# Altium PCB Sallen.PcbDoc
Units mm, origin at the board's own origin, x right, y up, seen from the top; angles counter-clockwise.
Board outline 100.27 x 50.25 mm, 2 copper layers (Top Layer, Bottom Layer); 102 components, 15 nets, 204 pads, 21 vias.
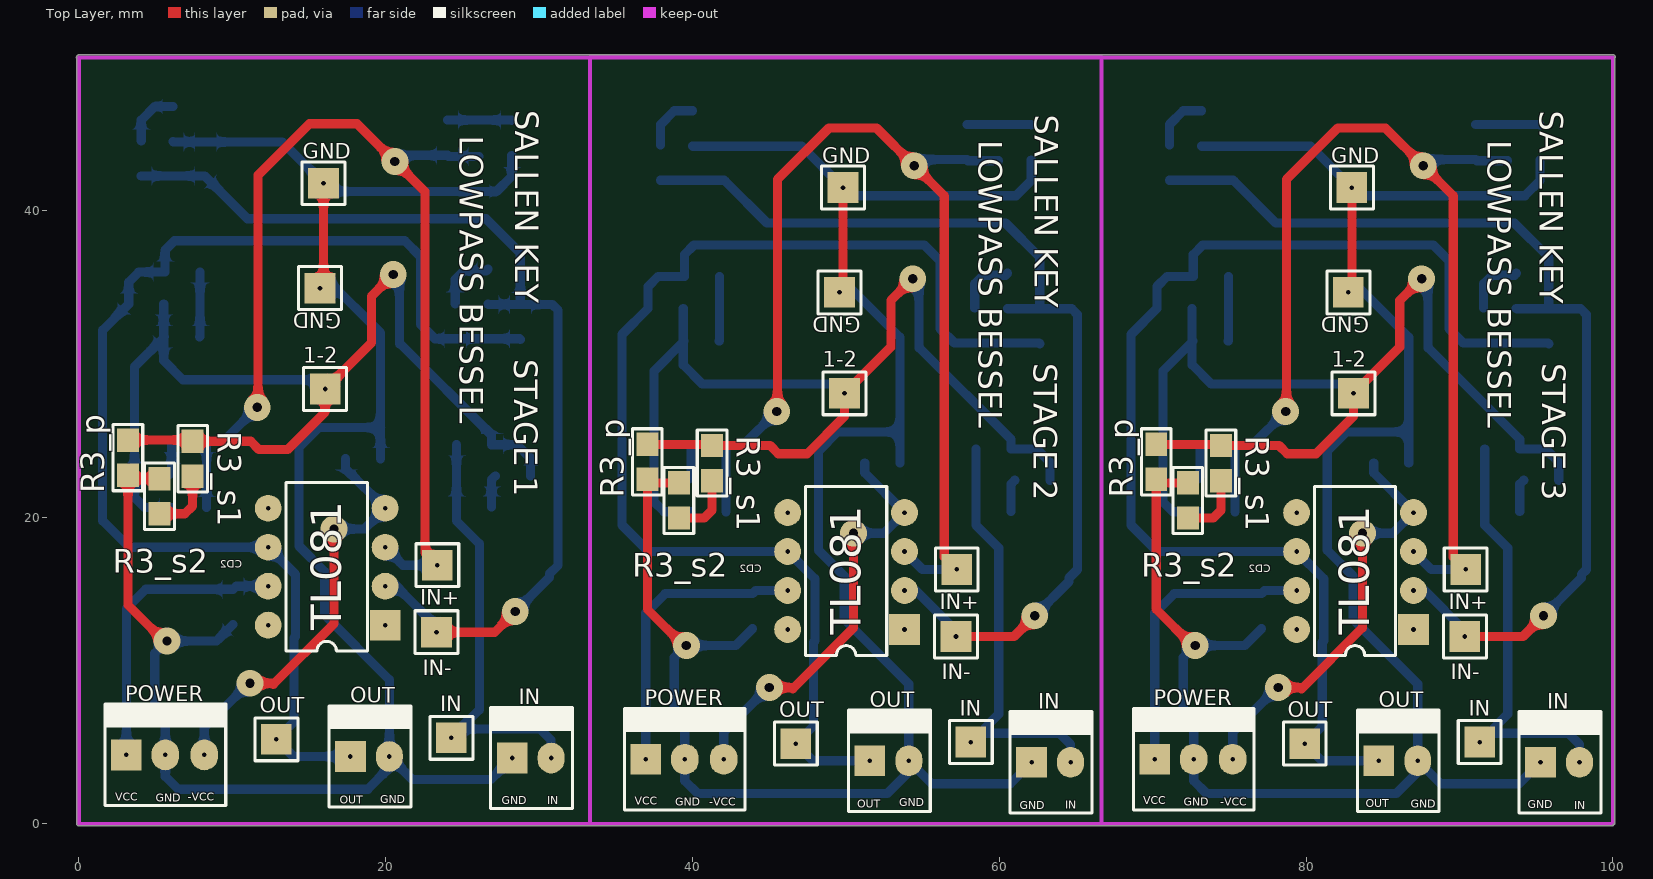
[diagram p0: Top Layer view]
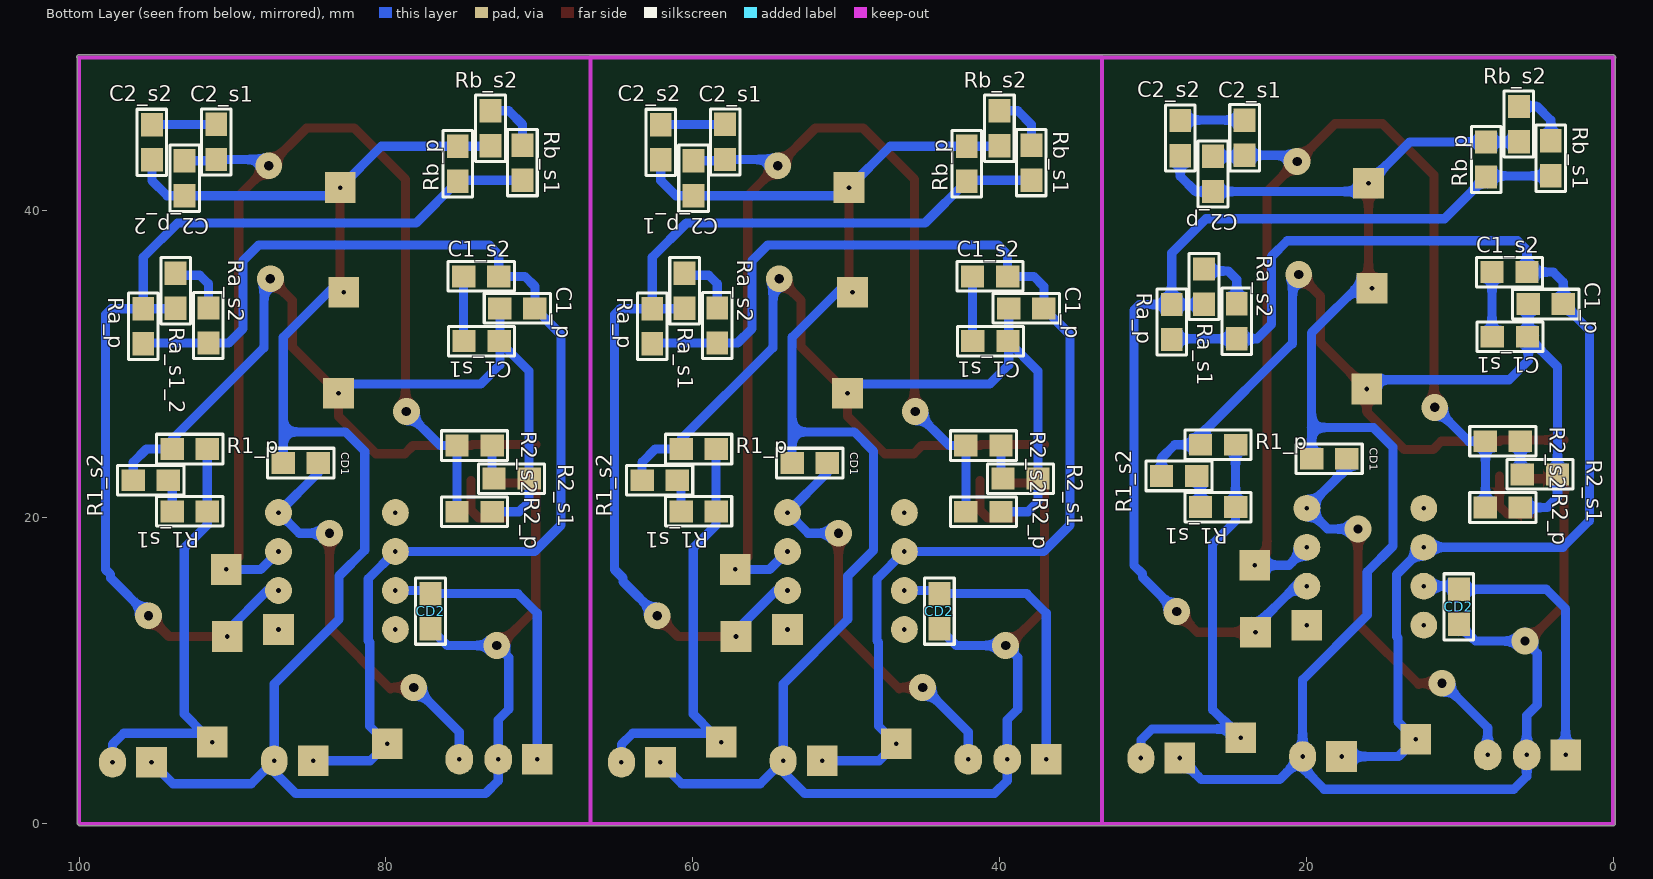
[diagram p1: Bottom Layer view, seen from below]
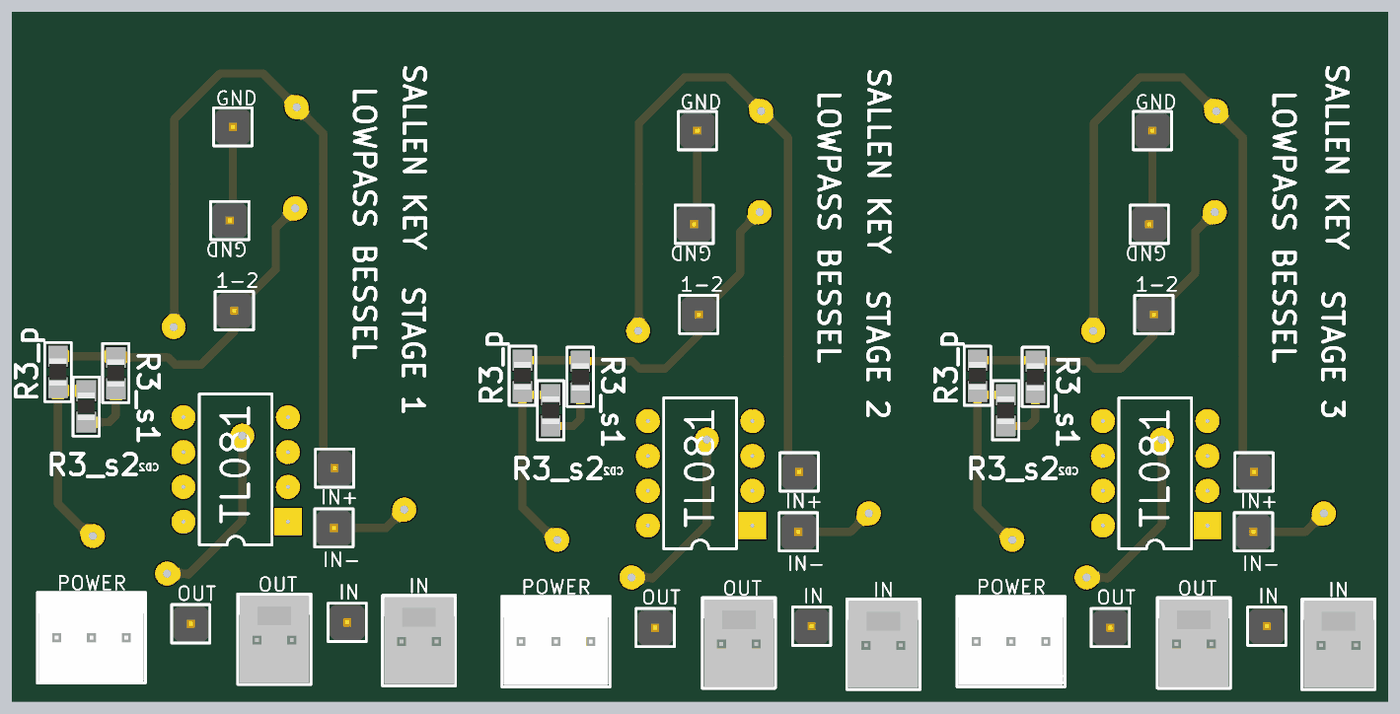
[diagram p2: 3D render of the assembled board from above, using the file's embedded part models]
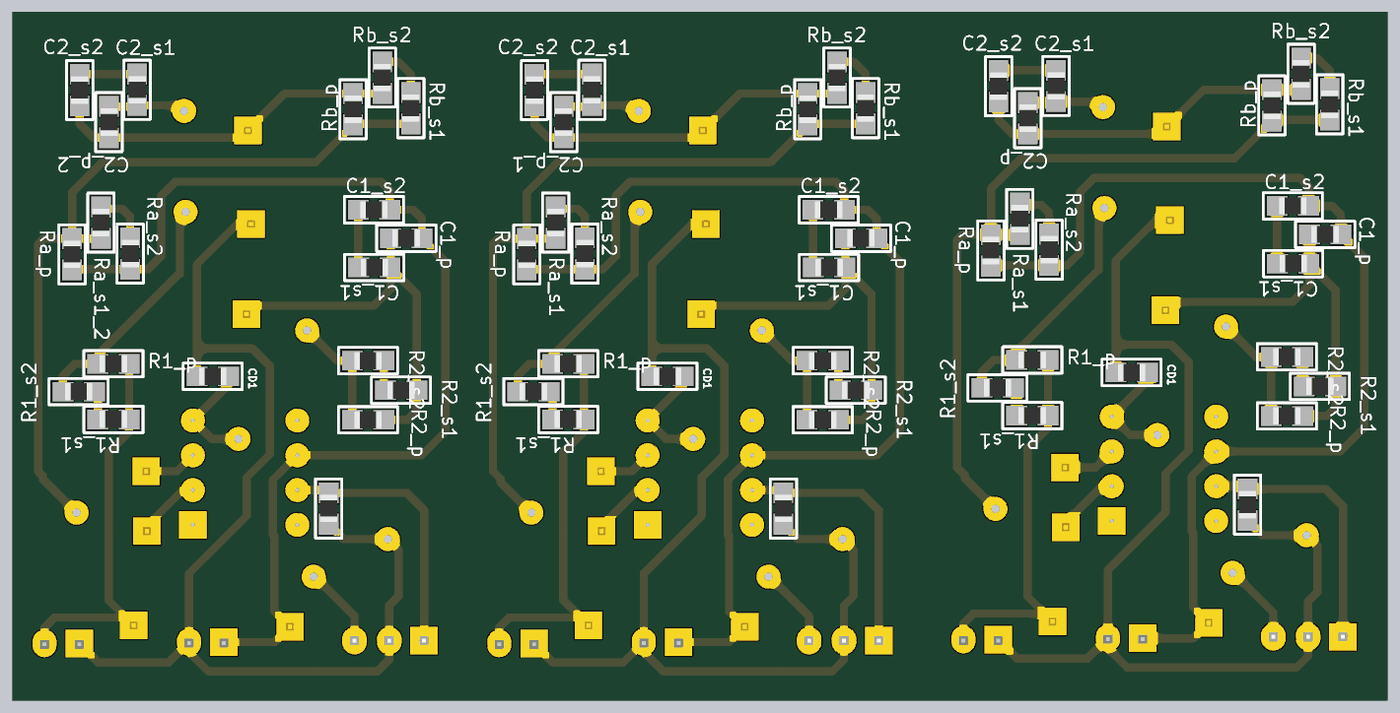
[diagram p3: 3D render of the assembled board from below, using the file's embedded part models]

## Layer stack, top to bottom
Top Solder: solder mask 0.0102, Solder Resist, Dk 3.5
Top Layer: signal copper 0.0356
Dielectric 1: dielectric 0.32, FR-4, Dk 4.8
Bottom Layer: signal copper 0.0356
Bottom Solder: solder mask 0.0102, Solder Resist, Dk 3.5

## Board outline
-0.127,0 -0.127,49.911 cw(c0,49.911) -0.119,49.956 -0.119,49.955 cw(c0,50) 0,50.127 100.012,50.127 cw(c100.012,50) 100.14,50 cw(c100.012,50) 100.127,49.945 100.127,0.076 cw(c100,0.076) 100.044,-0.044 cw(c99.924,0) 99.924,-0.127 0,-0.127 cw(c0,0)

## Design rules (kind name [scope] priority, off if disabled: settings)
Clearance [All] p1: gap=0.6 ignorepadtopadclearanceinfootprint=FALSE
PolygonConnect [All] p1: connectstyle=Relief reliefconductorwidth=0.254 reliefentries=4 polygonreliefangle="90 Angle" airgapwidth=0.254
RoutingVias [All] p1: holewidth=0.7 width=2.5 viastyle="Through Hole" minholewidth=0.7 minwidth=2.5 maxholewidth=0.7 maxwidth=2.5
SolderMaskExpansion [All] p1: expansion=0.102
Width [All] p1: maxlimit=0.6 minlimit=0.6 preferedwidth=0.6
30 further rules are at their usual default settings.

## Classes and differential pairs
component class Sallen: CD1 CD2 POWER1 R3_p R3_s1 R3_s2

## Components (designator, comment, footprint, x,y, rotation, side; value= is the part's Value field where it differs from the comment)
1-2 "1-2" TPTH 83.083,28.067 r0 top (schematic designator TP9)
1-2 "1-2" TPTH 49.911,28.067 r0 top (schematic designator TP9)
1-2 "1-2" TPTH 16.053,28.346 r0 top (schematic designator TP9)
C1_p "CAP" 0805 71.425,33.604 r180 bottom
C1_p "CAP" 0805 38.252,33.604 r180 bottom
C1_p "CAP" 0805 4.394,33.884 r180 bottom
C1_s1 "CAP" 0805 73.762,31.471 r0 bottom
C1_s1 "CAP" 0805 40.589,31.471 r0 bottom
C1_s1 "CAP" 0805 6.731,31.75 r0 bottom
C1_s2 "CAP" 0805 73.787,35.687 r180 bottom
C1_s2 "CAP" 0805 40.615,35.687 r180 bottom
C1_s2 "CAP" 0805 6.756,35.966 r180 bottom
C2_p "CAP" 0805 26.086,42.367 r270 bottom
C2_p_1 "CAP" 0805 59.944,42.088 r270 bottom (schematic designator C2_p)
C2_p_2 "CAP" 0805 93.116,42.088 r270 bottom (schematic designator C2_p)
C2_s1 "CAP" 0805 91.059,44.45 r90 bottom
C2_s1 "CAP" 0805 57.887,44.45 r90 bottom
C2_s1 "CAP" 0805 24.028,44.729 r90 bottom
C2_s2 "CAP" 0805 95.25,44.425 r270 bottom
C2_s2 "CAP" 0805 62.078,44.425 r270 bottom
C2_s2 "CAP" 0805 28.219,44.704 r270 bottom
CD1 "CAP" 0805 85.547,23.52 r0 bottom
CD1 "CAP" 0805 52.375,23.52 r0 bottom
CD1 "CAP" 0805 18.517,23.8 r0 bottom
CD2 "CAP" 0805 77.089,13.868 r270 bottom
CD2 "CAP" 0805 43.917,13.868 r270 bottom
CD2 "CAP" 0805 10.058,14.148 r270 bottom
GND "TP" TPTH 82.753,34.646 r90 top (schematic designator TP3)
GND "TP" TPTH 82.982,41.478 r90 top (schematic designator TP2)
GND "TP" TPTH 49.581,34.646 r90 top (schematic designator TP3)
GND "TP" TPTH 49.809,41.478 r90 top (schematic designator TP2)
GND "TP" TPTH 15.951,41.758 r90 top (schematic designator TP2)
GND "TP" TPTH 15.723,34.925 r90 top (schematic designator TP3)
IN "IN" TPTH 91.313,5.334 r0 top (schematic designator TP4)
IN "IN" MOLEX2 95.275,4.013 r0 top (schematic designator J3)
IN "IN" TPTH 58.141,5.334 r0 top (schematic designator TP4)
IN "IN" MOLEX2 62.103,4.013 r0 top (schematic designator J3)
IN "IN" MOLEX2 28.245,4.293 r0 top (schematic designator J3)
IN "IN" TPTH 24.282,5.613 r0 top (schematic designator TP4)
IN+ "IN+" TPTH 90.399,16.586 r0 top (schematic designator TP7)
IN+ "IN+" TPTH 57.226,16.586 r0 top (schematic designator TP7)
IN+ "IN+" TPTH 23.368,16.866 r0 top (schematic designator TP7)
IN- "IN-" TPTH 90.348,12.217 r0 top (schematic designator TP6)
IN- "IN-" TPTH 57.175,12.217 r0 top (schematic designator TP6)
IN- "IN-" TPTH 23.317,12.497 r0 top (schematic designator TP6)
OUT "OUT" TPTH 79.908,5.232 r0 top (schematic designator TP5)
OUT "OUT" MOLEX2 84.734,4.115 r0 top (schematic designator J4)
OUT "OUT" TPTH 46.736,5.232 r0 top (schematic designator TP5)
OUT "OUT" MOLEX2 51.562,4.115 r0 top (schematic designator J4)
OUT "OUT" MOLEX2 17.704,4.394 r0 top (schematic designator J4)
OUT "OUT" TPTH 12.878,5.512 r0 top (schematic designator TP5)
POWER "SUPPLY" MOLEX3 70.129,4.216 r0 top (schematic designator J2)
POWER "SUPPLY" MOLEX3 36.957,4.216 r0 top (schematic designator J2)
POWER "SUPPLY" MOLEX3 3.099,4.496 r0 top (schematic designator J2)
R1_p "270" 0805 92.786,24.435 r180 bottom
R1_p "270" 0805 59.614,24.435 r180 bottom
R1_p "270" 0805 25.756,24.714 r180 bottom
R1_s1 "270" 0805 92.786,20.371 r180 bottom
R1_s1 "270" 0805 59.614,20.371 r180 bottom
R1_s1 "270" 0805 25.756,20.65 r180 bottom
R1_s2 "270" 0805 95.326,22.403 r0 bottom
R1_s2 "270" 0805 62.154,22.403 r0 bottom
R1_s2 "270" 0805 28.296,22.682 r0 bottom
R2_p "270" 0805 74.219,20.345 r180 bottom
R2_p "270" 0805 41.046,20.345 r180 bottom
R2_p "270" 0805 7.188,20.625 r180 bottom
R2_s1 "270" 0805 71.806,22.504 r180 bottom
R2_s1 "270" 0805 38.633,22.504 r180 bottom
R2_s1 "270" 0805 4.775,22.784 r180 bottom
R2_s2 "270" 0805 74.219,24.663 r0 bottom
R2_s2 "270" 0805 41.046,24.663 r0 bottom
R2_s2 "270" 0805 7.188,24.943 r0 bottom
R3_p "270" 0805 70.231,23.597 r90 top
R3_p "270" 0805 37.059,23.597 r90 top
R3_p "270" 0805 3.2,23.876 r90 top
R3_s1 "270" 0805 74.447,23.52 r90 top
R3_s1 "270" 0805 41.275,23.52 r90 top
R3_s1 "270" 0805 7.417,23.8 r90 top
R3_s2 "270" 0805 72.288,21.082 r270 top
R3_s2 "270" 0805 39.116,21.082 r270 top
R3_s2 "270" 0805 5.258,21.361 r270 top
Ra_p "270" 0805 95.809,32.436 r90 bottom
Ra_p "270" 0805 62.636,32.436 r90 bottom
Ra_p "270" 0805 28.778,32.715 r90 bottom
Ra_s1 "270" 0805 60.528,34.747 r270 bottom
Ra_s1 "270" 0805 26.67,35.027 r270 bottom
Ra_s1_2 "270" 0805 93.701,34.747 r270 bottom (schematic designator Ra_s1)
Ra_s2 "270" 0805 91.567,32.487 r270 bottom
Ra_s2 "270" 0805 58.395,32.487 r270 bottom
Ra_s2 "270" 0805 24.536,32.766 r270 bottom
Rb_p "270" 0805 75.311,43.028 r270 bottom
Rb_p "270" 0805 42.139,43.028 r270 bottom
Rb_p "270" 0805 8.28,43.307 r270 bottom
Rb_s1 "270" 0805 71.095,43.104 r270 bottom
Rb_s1 "270" 0805 37.922,43.104 r270 bottom
Rb_s1 "270" 0805 4.064,43.383 r270 bottom
Rb_s2 "270" 0805 73.177,45.339 r90 bottom
Rb_s2 "270" 0805 40.005,45.339 r90 bottom
Rb_s2 "270" 0805 6.147,45.618 r90 bottom
TL081 "TL081" P008 83.185,16.485 r90 top (schematic designator U1)
TL081 "TL081" P008 50.013,16.485 r90 top (schematic designator U1)
TL081 "TL081" P008 16.154,16.764 r90 top (schematic designator U1)

## Footprints (in the part's own frame and the unit in brackets; to place one, negate y for a bottom-side part, rotate by r counter-clockwise, add the part's x,y. Pads: shape width x height; smd on the part's side, far side on the other; paste and mask are expansions set on the pad)
0805 [mil] "Pasivo 0805"
  rect 60x56 smd: 1(-45,0) 2(45,0)
  silkscreen extent -85,-38 85,38, body extent -40,-24 39,25, height 15
MOLEX2 [mm]
  rect 2x2 hole 0.3: 1(0,0)
  oval 1.75x2 hole 0.3: 2(2.54,0)
  silkscreen extent -1.4,-3.3 3.94,3.3, body extent -1.27,-3.17 3.81,3.17, height 10.74
MOLEX3 [mm]
  rect 2x2 hole 0.3: 1(0,0)
  oval 1.8x2 hole 0.3: 2(2.54,0) 3(5.08,0)
  silkscreen extent -1.4,-3.3 6.48,3.3, body extent -1.27,-3.17 6.35,3.17, height 10.74
P008 [mm] "DIP; 8 Leads; Row Spacing 7.62 mm; Pitch 2.54 mm"
  rect 2x2 hole 0.3: 1(-3.81,-3.81)
  round 1.75 hole 0.3: 2(-1.27,-3.81) 3(1.27,-3.81) 4(3.81,-3.81) 5(3.81,3.81) 6(1.27,3.81) 7(-1.27,3.81) 8(-3.81,3.81)
  silkscreen extent -5.5,-2.65 5.5,2.65
TPTH [mm]
  rect 2x2 hole 0.3: 1(0,0)
  silkscreen extent -1.4,-1.4 1.4,1.4, body extent -1.27,-1.27 1.27,1.27, height 6.04

## Part data
1-2 1-2 1-2 IN IN IN IN+ IN+ IN+ IN- IN- IN- OUT OUT OUT: library part TP
IN IN IN OUT OUT OUT: library part MOLEX2
POWER POWER POWER: library part MOLEX3
R1_p R1_p R1_p R1_s1 R1_s1 R1_s1 R1_s2 R1_s2 R1_s2 R2_p R2_p R2_p R2_s1 R2_s1 R2_s1 R2_s2 R2_s2 R2_s2 R3_p R3_p R3_p R3_s1 R3_s1 R3_s1 R3_s2 R3_s2 R3_s2 Ra_p Ra_p Ra_p Ra_s1 Ra_s1 Ra_s1_2 Ra_s2 Ra_s2 Ra_s2 Rb_p Rb_p Rb_p Rb_s1 Rb_s1 Rb_s1 Rb_s2 Rb_s2 Rb_s2: library part RES
TL081 TL081 TL081: library part TL081P, "JFET-Input Operational Amplifier", Code_JEDEC=MO-001-AN, ComponentLink1Description="Manufacturer Link", ComponentLink1URL=http://www.ti.com/, ComponentLink2Description=Datasheet, ComponentLink2URL=http://www-s.ti.com/sc/ds/tl081.pdf, DatasheetVersion=Feb-1999, LatestRevisionDate=04-Mar-2005, LatestRevisionNote="Stylized 3D Model Added.", Note="Pin 8 is not connected", PackageDescription="DIP; 8 Leads; Row Spacing 7.62 mm; Pitch 2.54 mm", PackageReference=P008, PackageVersion=Jun-1999, Published=16-Jan-2001, Publisher="Altium Limited"

## Via types
v1: diameter 1.75, hole 0.6, Top Layer to Bottom Layer, 21 vias

## Nets (pads, with @x,y where several pads share a name; then routed paths per layer and width w, separated by ;. In a path a pad name is that pad's centre, name@x,y a point inside that pad or via, vN(x,y) a via of type N, cw(c..) or ccw(c..) an arc to the next point about the centre after c; other vN are vias at no path point)
-VCC: CD1.1@17.374,23.8 POWER.3@8.179,4.496 TL081.4@19.964,20.574 | length 27.5
  Top Layer w0.6: v1(11.151,9.169) 12.598,9.169 12.675,9.093 16.637,13.056 v1(16.637,19.228)
  Bottom Layer w0.6: POWER.3@8.179,4.496 8.179,6.274 11.074,9.169 v1(11.151,9.169) ; v1(16.637,19.228) 18.618,19.228 19.964,20.574 17.374,23.165 CD1.1@17.374,23.8
GND: C2_p.2 C2_s2.2@28.219,43.561 CD1.2@19.66,23.8 CD2.2@10.058,13.005 GND.1@15.723,34.925 GND.1@15.951,41.758 IN.1@28.245,4.293 OUT.2@20.244,4.394 POWER.2@5.639,4.496 R3_p.1@3.2,22.733 R3_s2.1@5.258,22.504 Rb_p.1@8.28,44.45 Rb_s2.1@6.147,44.475 | length 128.3
  Top Layer w0.6: R3_s2.1@5.258,22.504 3.429,22.504 3.2,22.733 3.2,14.275 5.563,11.913 v1(5.74,11.913) ; GND.1@15.951,35.712 GND.1@15.951,41.758
  Bottom Layer w0.6: Rb_s2.1@6.147,44.475 6.172,44.45 8.28,44.45 13.259,44.45 15.951,41.758 16.485,41.224 C2_p.2 27.229,41.224 28.219,42.215 C2_s2.2@28.219,43.561 ; CD2.2@10.058,13.005 8.966,11.913 v1(5.74,11.913) ; GND.1@16.231,35.433 19.66,32.004 19.66,25.832 ; CD1.2@19.66,23.8 19.66,25.832 ; IN.1@28.245,4.293 26.848,2.896 21.742,2.896 OUT.2@20.244,4.394 ; v1@5.156,11.913 5.74,12.497 v1(5.74,11.913) ; v1@5.156,11.913 5.156,11.328 4.953,11.125 4.953,7.747 5.639,7.061 5.639,4.496 5.639,3.099 6.477,2.261 18.843,2.261 20.244,3.661 OUT.2@20.244,4.394 ; v1@5.156,11.913 v1(5.74,11.913) ; 19.66,25.832 15.621,25.832 14.351,24.562 14.351,18.11 16.027,16.434 16.027,13.618 20.244,9.402 OUT.2@20.244,4.394
NetC1_p_1: 1-2.1@16.053,28.346 C1_p.1@5.537,33.884 C1_s1.1@5.588,31.75 R1_p.1@26.899,24.714 R1_s2.2@29.439,22.682 R2_p.2@6.045,20.625 R2_s1.2@3.632,22.784 R3_p.2@3.2,25.019 R3_s1.2@7.417,24.943 | length 71.7
  Top Layer w0.6: R3_p.2@3.2,25.019 7.341,25.019 7.417,24.943 11.201,24.943 11.735,24.409 13.614,24.409 16.053,26.848 16.053,28.346 19.075,31.369 19.075,34.392 v1(20.498,35.814)
  Bottom Layer w0.6: C1_p.1@5.537,33.884 C1_s1.1@5.537,31.699 ; C1_s1.1@5.588,31.75 C1_s1.1@5.537,31.699 ; R2_p.2@6.045,20.625 4.293,20.625 3.632,21.285 3.632,22.784 3.632,29.794 C1_s1.1@5.537,31.699 ; 1-2.1@16.053,28.346 15.443,28.956 6.782,28.956 5.537,30.201 C1_s1.1@5.537,31.699 ; v1(20.498,35.814) 20.904,35.408 20.904,31.293 20.955,31.293 26.899,25.349 26.899,24.714 28.575,24.714 29.439,23.851 R1_s2.2@29.439,22.682
NetC1_p_2: C1_p.2@3.251,33.884 C1_s2.2@5.613,35.966 OUT.1@12.878,5.512 OUT.1@17.704,4.394 Ra_p.1@28.778,31.572 Ra_s2.2@24.536,31.623 TL081.6@12.344,18.034 | length 79.7
  Bottom Layer w0.6: OUT.1@17.602,4.293 17.704,4.394 13.995,4.394 12.878,5.512 14.021,6.655 14.021,12.12 14.119,12.219 14.119,16.259 12.344,18.034 3.277,18.034 1.549,19.761 1.549,32.182 3.251,33.884 3.251,35.306 3.912,35.966 5.613,35.966 5.613,37.389 6.236,38.011 21.247,38.011 22.276,36.982 22.276,32.563 23.216,31.623 24.536,31.623 28.727,31.623 Ra_p.1@28.778,31.572
NetC1_s1_2: C1_s1.2@7.874,31.75 C1_s2.1@7.899,35.966 | length 4.2
  Bottom Layer w0.6: C1_s1.2@7.874,31.75 7.899,31.775 C1_s2.1@7.899,35.966
NetC2_p_1: C2_p.1 C2_s1.1@24.028,43.586 IN+.1@23.368,16.866 R2_p.1@8.331,20.625 R2_s2.2@8.331,24.943 TL081.3@19.964,18.034 | length 71.5
  Top Layer w0.6: v1@11.684,27.33 11.684,42.291 15.037,45.644 18.136,45.644 v1(20.599,43.18) 22.555,41.224 22.555,17.678 IN+.1@23.368,16.866
  Bottom Layer w0.6: R2_p.1@8.331,20.625 8.331,24.943 9.423,24.943 v1(11.633,27.153) ; TL081.3@19.964,18.034 21.133,16.866 IN+.1@23.368,16.866 ; v1@20.98,43.231 21.336,43.586 24.028,43.586 24.105,43.51 C2_p.1
NetC2_s1_2: C2_s1.2@24.028,45.872 C2_s2.1@28.219,45.847 | length 4.2
  Bottom Layer w0.6: C2_s1.2@24.028,45.872 28.194,45.872 C2_s2.1@28.219,45.847
NetJ3_2: IN.1@24.282,5.613 IN.2@30.785,4.293 R1_p.2@24.613,24.714 R1_s1.2@24.613,20.65 | length 27.9
  Bottom Layer w0.6: IN.1@24.282,5.613 IN.1@24.862,6.193 ; R1_p.2@24.613,24.714 24.613,20.65 24.613,19.761 26.111,18.263 26.111,7.442 IN.1@24.862,6.193 ; IN.2@30.785,4.293 30.785,5.461 30.053,6.193 IN.1@24.862,6.193
NetR1_s1_1: R1_s1.1@26.899,20.65 R1_s2.1@27.153,22.682 | length 2.1
  Bottom Layer w0.6: R1_s1.1@26.899,20.65 26.899,22.428 R1_s2.1@27.153,22.682
NetR2_s1_1: R2_s1.1@5.918,22.784 R2_s2.1@6.045,24.943 | length 2.2
  Bottom Layer w0.6: R2_s1.1@5.918,22.784 6.045,22.911 R2_s2.1@6.045,24.943
NetR3_s1_1: R3_s1.1@7.417,22.657 R3_s2.2@5.258,20.218 | length 4.3
  Top Layer w0.6: R3_s2.2@5.258,20.218 6.909,20.218 7.417,20.726 R3_s1.1@7.417,22.657
NetRa_p_2: IN-.1@23.317,12.497 Ra_p.2@28.778,33.858 Ra_s1.2@26.67,33.884 Rb_p.2@8.28,42.164 Rb_s1.2@4.064,42.24 TL081.2@19.964,15.494 | length 66.2
  Top Layer w0.6: IN-.1@23.317,12.497 27.102,12.497 v1(28.448,13.843)
  Bottom Layer w0.6: Rb_s1.2@4.064,42.24 8.204,42.24 8.28,42.164 10.998,39.446 26.543,39.446 28.778,37.211 Ra_p.2@28.778,33.858 ; TL081.2@19.964,15.494 20.697,15.494 23.317,12.874 IN-.1@23.317,12.497 ; Ra_s1.2@26.67,33.884 26.695,33.858 Ra_p.2@28.778,33.858 ; v1(28.448,13.843) 30.683,16.078 30.683,16.307 31.242,16.866 31.242,33.477 30.861,33.858 Ra_p.2@28.778,33.858
NetRa_s1_1: Ra_s1.1@26.67,36.17 Ra_s2.1@24.536,33.909 | length 4
  Bottom Layer w0.6: Ra_s2.1@24.536,33.909 24.536,35.484 25.095,36.043 26.543,36.043 Ra_s1.1@26.67,36.17
NetRb_s1_1: Rb_s1.1@4.064,44.526 Rb_s2.2@6.147,46.761 | length 3.8
  Bottom Layer w0.6: Rb_s1.1@4.064,44.526 4.064,45.872 4.953,46.761 Rb_s2.2@6.147,46.761
VCC: CD2.1@10.058,15.291 POWER.1@3.099,4.496 TL081.7@12.344,15.494 | length 19.4
  Bottom Layer w0.6: POWER.1@3.099,4.496 3.099,14.021 4.369,15.291 10.058,15.291 10.262,15.494 TL081.7@12.344,15.494
pads on no net: 1-2.1@49.911,28.067 1-2.1@83.083,28.067 C1_p.1@39.395,33.604 C1_p.1@72.568,33.604 C1_p.2@37.109,33.604 C1_p.2@70.282,33.604 C1_s1.1@39.446,31.471 C1_s1.1@72.619,31.471 C1_s1.2@41.732,31.471 C1_s1.2@74.905,31.471 C1_s2.1@41.758,35.687 C1_s2.1@74.93,35.687 C1_s2.2@39.472,35.687 C1_s2.2@72.644,35.687 C2_p_1.1 C2_p_1.2 C2_p_2.1 C2_p_2.2 C2_s1.1@57.887,43.307 C2_s1.1@91.059,43.307 C2_s1.2@57.887,45.593 C2_s1.2@91.059,45.593 C2_s2.1@62.078,45.568 C2_s2.1@95.25,45.568 C2_s2.2@62.078,43.282 C2_s2.2@95.25,43.282 CD1.1@51.232,23.52 CD1.1@84.404,23.52 CD1.2@53.518,23.52 CD1.2@86.69,23.52 CD2.1@43.917,15.011 CD2.1@77.089,15.011 CD2.2@43.917,12.725 CD2.2@77.089,12.725 GND.1@49.581,34.646 GND.1@49.809,41.478 GND.1@82.753,34.646 GND.1@82.982,41.478 IN+.1@57.226,16.586 IN+.1@90.399,16.586 IN-.1@57.175,12.217 IN-.1@90.348,12.217 IN.1@58.141,5.334 IN.1@62.103,4.013 IN.1@91.313,5.334 IN.1@95.275,4.013 IN.2@64.643,4.013 IN.2@97.815,4.013 OUT.1@46.736,5.232 OUT.1@51.562,4.115 OUT.1@79.908,5.232 OUT.1@84.734,4.115 OUT.2@54.102,4.115 OUT.2@87.274,4.115 POWER.1@36.957,4.216 POWER.1@70.129,4.216 POWER.2@39.497,4.216 POWER.2@72.669,4.216 POWER.3@42.037,4.216 POWER.3@75.209,4.216 R1_p.1@60.757,24.435 R1_p.1@93.929,24.435 R1_p.2@58.471,24.435 R1_p.2@91.643,24.435 R1_s1.1@60.757,20.371 R1_s1.1@93.929,20.371 R1_s1.2@58.471,20.371 R1_s1.2@91.643,20.371 R1_s2.1@61.011,22.403 R1_s2.1@94.183,22.403 R1_s2.2@63.297,22.403 R1_s2.2@96.469,22.403 R2_p.1@42.189,20.345 R2_p.1@75.362,20.345 R2_p.2@39.903,20.345 R2_p.2@73.076,20.345 R2_s1.1@39.776,22.504 R2_s1.1@72.949,22.504 R2_s1.2@37.49,22.504 R2_s1.2@70.663,22.504 R2_s2.1@39.903,24.663 R2_s2.1@73.076,24.663 R2_s2.2@42.189,24.663 R2_s2.2@75.362,24.663 R3_p.1@37.059,22.454 R3_p.1@70.231,22.454 R3_p.2@37.059,24.74 R3_p.2@70.231,24.74 R3_s1.1@41.275,22.377 R3_s1.1@74.447,22.377 R3_s1.2@41.275,24.663 R3_s1.2@74.447,24.663 R3_s2.1@39.116,22.225 R3_s2.1@72.288,22.225 R3_s2.2@39.116,19.939 R3_s2.2@72.288,19.939 Ra_p.1@62.636,31.293 Ra_p.1@95.809,31.293 Ra_p.2@62.636,33.579 Ra_p.2@95.809,33.579 Ra_s1.1@60.528,35.89 Ra_s1.2@60.528,33.604 Ra_s1_2.1 Ra_s1_2.2 Ra_s2.1@58.395,33.63 Ra_s2.1@91.567,33.63 Ra_s2.2@58.395,31.344 Ra_s2.2@91.567,31.344 Rb_p.1@42.139,44.171 Rb_p.1@75.311,44.171 Rb_p.2@42.139,41.885 Rb_p.2@75.311,41.885 Rb_s1.1@37.922,44.247 Rb_s1.1@71.095,44.247 Rb_s1.2@37.922,41.961 Rb_s1.2@71.095,41.961 Rb_s2.1@40.005,44.196 Rb_s2.1@73.177,44.196 Rb_s2.2@40.005,46.482 Rb_s2.2@73.177,46.482 TL081.1 TL081.2@53.823,15.215 TL081.2@86.995,15.215 TL081.3@53.823,17.755 TL081.3@86.995,17.755 TL081.4@53.823,20.295 TL081.4@86.995,20.295 TL081.5 TL081.6@46.203,17.755 TL081.6@79.375,17.755 TL081.7@46.203,15.215 TL081.7@79.375,15.215 TL081.8
copper on no net: | length 1033.8
  Top Layer w0.6: 37.059,24.74 41.199,24.74 41.275,24.663 45.06,24.663 45.593,24.13 47.473,24.13 49.911,26.568 49.911,28.067 52.934,31.09 52.934,34.112 v1(54.356,35.535) ; 39.116,19.939 40.767,19.939 41.275,20.447 41.275,22.377 ; 39.116,22.225 37.287,22.225 37.059,22.454 37.059,13.995 39.421,11.633 v1(39.599,11.633) ; v1(45.009,8.89) 46.457,8.89 46.533,8.814 50.495,12.776 v1(50.495,18.948) ; v1@45.542,27.051 45.542,42.012 48.895,45.364 51.994,45.364 v1(54.458,42.901) 56.413,40.945 56.413,17.399 57.226,16.586 ; 49.809,35.433 49.809,41.478 ; 57.175,12.217 60.96,12.217 v1(62.306,13.564) ; 70.231,24.74 74.371,24.74 74.447,24.663 78.232,24.663 78.765,24.13 80.645,24.13 83.083,26.568 83.083,28.067 86.106,31.09 86.106,34.112 v1(87.528,35.535) ; 72.288,19.939 73.939,19.939 74.447,20.447 74.447,22.377 ; 72.288,22.225 70.46,22.225 70.231,22.454 70.231,13.995 72.593,11.633 v1(72.771,11.633) ; v1(78.181,8.89) 79.629,8.89 79.705,8.814 83.668,12.776 v1(83.668,18.948) ; v1@78.715,27.051 78.715,42.012 82.067,45.364 85.166,45.364 v1(87.63,42.901) 89.586,40.945 89.586,17.399 90.399,16.586 ; 82.982,35.433 82.982,41.478 ; 90.348,12.217 94.132,12.217 v1(95.479,13.564)
  Bottom Layer w0.6: 36.957,4.216 36.957,13.741 38.227,15.011 43.917,15.011 44.12,15.215 46.203,15.215 ; 37.922,41.961 42.062,41.961 42.139,41.885 44.856,39.167 60.401,39.167 62.636,36.932 62.636,33.579 ; 37.922,44.247 37.922,45.593 38.811,46.482 40.005,46.482 ; 39.395,33.604 39.395,31.42 ; 39.446,31.471 39.395,31.42 ; 39.776,22.504 39.903,22.631 39.903,24.663 ; 39.903,20.345 38.151,20.345 37.49,21.006 37.49,22.504 37.49,29.515 39.395,31.42 ; 40.005,44.196 40.03,44.171 42.139,44.171 47.117,44.171 49.809,41.478 50.343,40.945 59.944,40.945 61.087,40.945 62.078,41.935 62.078,43.282 ; 41.732,31.471 41.758,31.496 41.758,35.687 ; 42.037,4.216 42.037,5.994 44.933,8.89 v1(45.009,8.89) ; 42.189,20.345 42.189,24.663 43.282,24.663 v1(45.491,26.873) ; 43.917,12.725 42.824,11.633 v1(39.599,11.633) ; 49.911,28.067 49.301,28.677 40.64,28.677 39.395,29.921 39.395,31.42 ; 50.089,35.154 53.518,31.725 53.518,25.552 ; v1(50.495,18.948) 52.476,18.948 53.823,20.295 51.232,22.885 51.232,23.52 ; 51.46,4.013 51.562,4.115 47.854,4.115 46.736,5.232 47.879,6.375 47.879,11.841 47.978,11.939 47.978,15.98 46.203,17.755 37.135,17.755 35.408,19.482 35.408,31.902 37.109,33.604 37.109,35.027 37.77,35.687 39.472,35.687 39.472,37.109 40.094,37.732 55.105,37.732 56.134,36.703 56.134,32.283 57.074,31.344 58.395,31.344 62.586,31.344 62.636,31.293 ; 53.518,23.52 53.518,25.552 ; 53.823,15.215 54.555,15.215 57.175,12.595 57.175,12.217 ; 53.823,17.755 54.991,16.586 57.226,16.586 ; v1(54.356,35.535) 54.762,35.128 54.762,31.013 54.813,31.013 60.757,25.07 60.757,24.435 62.433,24.435 63.297,23.571 63.297,22.403 ; v1@54.839,42.951 55.194,43.307 57.887,43.307 57.963,43.231 59.944,43.231 ; 57.887,45.593 62.052,45.593 62.078,45.568 ; 58.141,5.334 58.72,5.913 ; 58.395,33.63 58.395,35.204 58.953,35.763 60.401,35.763 60.528,35.89 ; 58.471,24.435 58.471,20.371 58.471,19.482 59.969,17.983 59.969,7.163 58.72,5.913 ; 60.528,33.604 60.554,33.579 62.636,33.579 ; 60.757,20.371 60.757,22.149 61.011,22.403 ; 62.103,4.013 60.706,2.616 55.601,2.616 54.102,4.115 ; v1(62.306,13.564) 64.541,15.799 64.541,16.027 65.1,16.586 65.1,33.198 64.719,33.579 62.636,33.579 ; 64.643,4.013 64.643,5.182 63.911,5.913 58.72,5.913 ; 70.129,4.216 70.129,13.741 71.399,15.011 77.089,15.011 77.292,15.215 79.375,15.215 ; 71.095,41.961 75.235,41.961 75.311,41.885 78.029,39.167 93.574,39.167 95.809,36.932 95.809,33.579 ; 71.095,44.247 71.095,45.593 71.984,46.482 73.177,46.482 ; 72.568,33.604 72.568,31.42 ; 72.619,31.471 72.568,31.42 ; 72.949,22.504 73.076,22.631 73.076,24.663 ; 73.076,20.345 71.323,20.345 70.663,21.006 70.663,22.504 70.663,29.515 72.568,31.42 ; 73.177,44.196 73.203,44.171 75.311,44.171 80.289,44.171 82.982,41.478 83.515,40.945 93.116,40.945 94.259,40.945 95.25,41.935 95.25,43.282 ; 74.905,31.471 74.93,31.496 74.93,35.687 ; 75.209,4.216 75.209,5.994 78.105,8.89 v1(78.181,8.89) ; 75.362,20.345 75.362,24.663 76.454,24.663 v1(78.664,26.873) ; 77.089,12.725 75.997,11.633 v1(72.771,11.633) ; 83.083,28.067 82.474,28.677 73.812,28.677 72.568,29.921 72.568,31.42 ; 83.261,35.154 86.69,31.725 86.69,25.552 ; v1(83.668,18.948) 85.649,18.948 86.995,20.295 84.404,22.885 84.404,23.52 ; 84.633,4.013 84.734,4.115 81.026,4.115 79.908,5.232 81.051,6.375 81.051,11.841 81.15,11.939 81.15,15.98 79.375,17.755 70.307,17.755 68.58,19.482 68.58,31.902 70.282,33.604 70.282,35.027 70.942,35.687 72.644,35.687 72.644,37.109 73.266,37.732 88.278,37.732 89.306,36.703 89.306,32.283 90.246,31.344 91.567,31.344 95.758,31.344 95.809,31.293 ; 86.69,23.52 86.69,25.552 ; 86.995,15.215 87.728,15.215 90.348,12.595 90.348,12.217 ; 86.995,17.755 88.163,16.586 90.399,16.586 ; v1(87.528,35.535) 87.935,35.128 87.935,31.013 87.986,31.013 93.929,25.07 93.929,24.435 95.606,24.435 96.469,23.571 96.469,22.403 ; v1@88.011,42.951 88.367,43.307 91.059,43.307 91.135,43.231 93.116,43.231 ; 91.059,45.593 95.225,45.593 95.25,45.568 ; 91.313,5.334 91.892,5.913 ; 91.567,33.63 91.567,35.204 92.126,35.763 93.574,35.763 93.701,35.89 ; 91.643,24.435 91.643,20.371 91.643,19.482 93.142,17.983 93.142,7.163 91.892,5.913 ; 93.701,33.604 93.726,33.579 95.809,33.579 ; 93.929,20.371 93.929,22.149 94.183,22.403 ; 95.275,4.013 93.878,2.616 88.773,2.616 87.274,4.115 ; v1(95.479,13.564) 97.942,16.027 97.942,16.256 98.273,16.586 98.273,33.198 97.892,33.579 95.809,33.579 ; 97.815,4.013 97.815,5.182 97.084,5.913 91.892,5.913 ; v1@39.014,11.633 v1(39.599,11.633) ; v1@39.014,11.633 39.014,11.049 38.811,10.846 38.811,7.468 39.497,6.782 39.497,4.216 39.497,2.819 40.335,1.981 52.701,1.981 54.102,3.382 54.102,4.115 ; v1@39.014,11.633 39.599,12.217 v1(39.599,11.633) ; 53.518,25.552 49.479,25.552 48.209,24.282 48.209,17.831 49.886,16.154 49.886,13.339 54.102,9.122 54.102,4.115 ; v1@72.187,11.633 v1(72.771,11.633) ; v1@72.187,11.633 72.187,11.049 71.984,10.846 71.984,7.468 72.669,6.782 72.669,4.216 72.669,2.819 73.508,1.981 85.874,1.981 87.274,3.382 87.274,4.115 ; v1@72.187,11.633 72.771,12.217 v1(72.771,11.633) ; 86.69,25.552 82.652,25.552 81.382,24.282 81.382,17.831 83.058,16.154 83.058,13.339 87.274,9.122 87.274,4.115

## Keep-outs
Keep-Out Layer:
  lines w0.254: 66.66,0 66.66,50 33.33,50 33.33,0 33.355,-0.025 99.975,-0.025 100,0 ; 100,0 0,0 0,49.886 -0.076,49.962 99.949,49.962 100,49.911 100,0

## Silkscreen, mask and mechanical layers (free items; w line width, h text height)
Top Overlay:
  text "SALLEN KEY" at 28.448,46.507 h1.52 r270
  text "SALLEN KEY" at 95.225,46.482 h1.52 r270
  text "SALLEN KEY" at 62.306,46.228 h1.52 r270
  text "LOWPASS BESSEL" at 24.816,44.856 h1.52 r270
  text "LOWPASS BESSEL" at 58.674,44.577 h1.52 r270
  text "LOWPASS BESSEL" at 91.846,44.577 h1.52 r270
  text "STAGE 1" at 28.372,30.302 h1.52 r270
  text "STAGE 2" at 62.23,30.023 h1.52 r270
  text "STAGE 3" at 95.402,30.023 h1.52 r270
  text "VCC" at 2.362,1.524 h0.52
  text "-VCC" at 7.112,1.499 h0.52
  text "GND" at 5.029,1.448 h0.52
  text "GND" at 19.66,1.346 h0.52
  text "OUT" at 17.018,1.321 h0.52
  text "GND" at 27.559,1.27 h0.52
  text "IN" at 30.531,1.27 h0.52
  text "VCC" at 69.367,1.27 h0.52
  text "VCC" at 36.246,1.245 h0.52
  text "GND" at 38.887,1.194 h0.52
  text "-VCC" at 41.097,1.194 h0.52
  text "GND" at 72.034,1.194 h0.52
  text "-VCC" at 74.397,1.194 h0.52
  text "GND" at 53.492,1.143 h0.52
  text "OUT" at 83.896,1.092 h0.52
  text "OUT" at 50.749,1.067 h0.52
  text "GND" at 86.817,1.041 h0.52
  text "GND" at 94.437,1.016 h0.52
  text "IN" at 64.313,0.991 h0.52
  text "GND" at 61.341,0.965 h0.52
  text "IN" at 97.485,0.94 h0.52